# EAGLE board circuito1.1 (EAGLE 9.6.2)
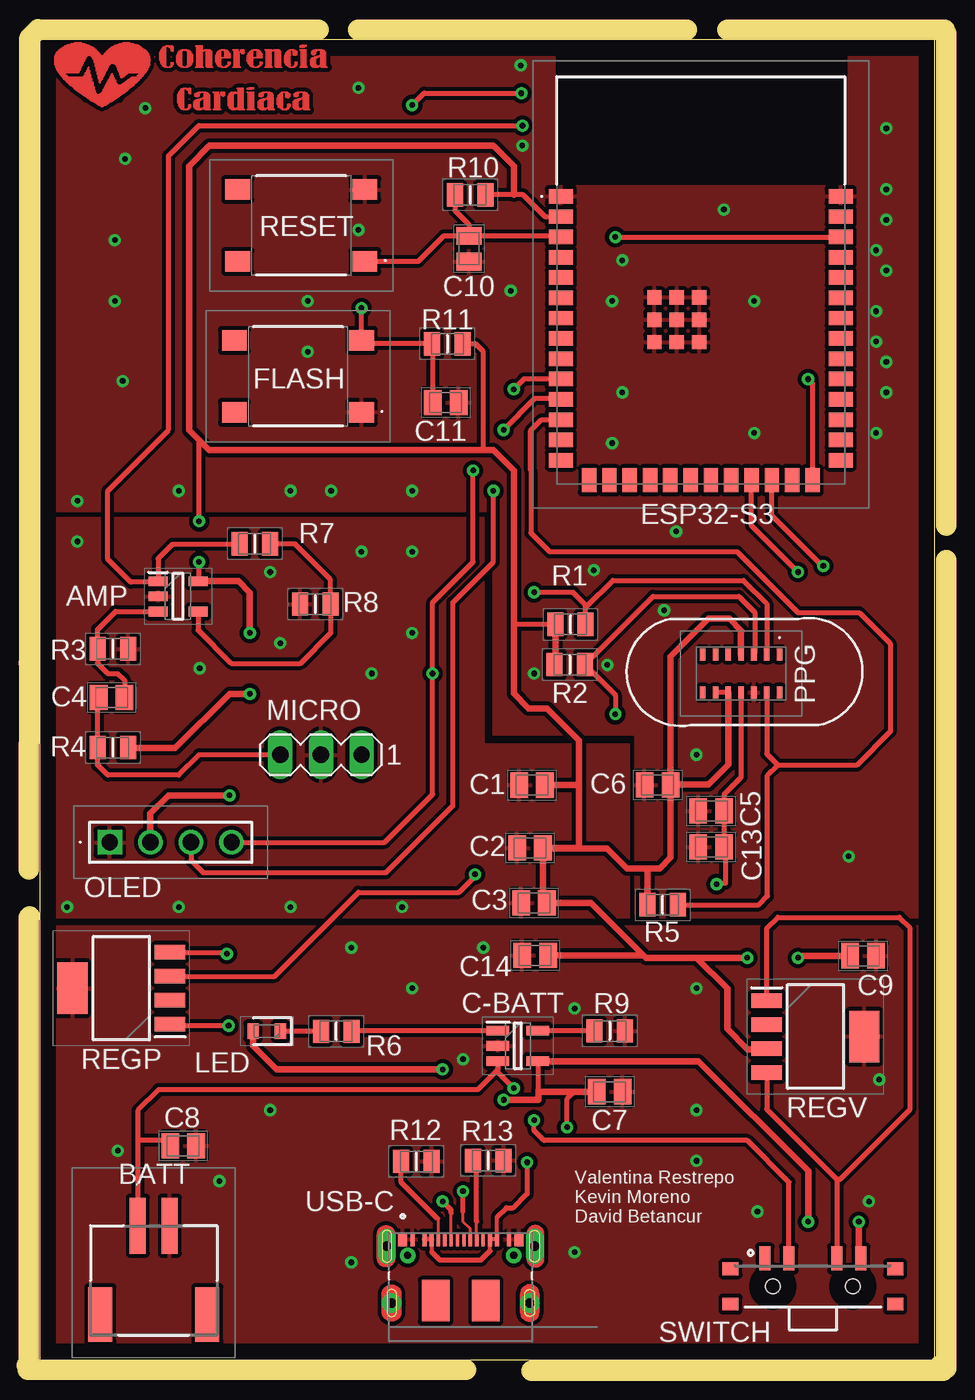
[diagram p0: board, top side]
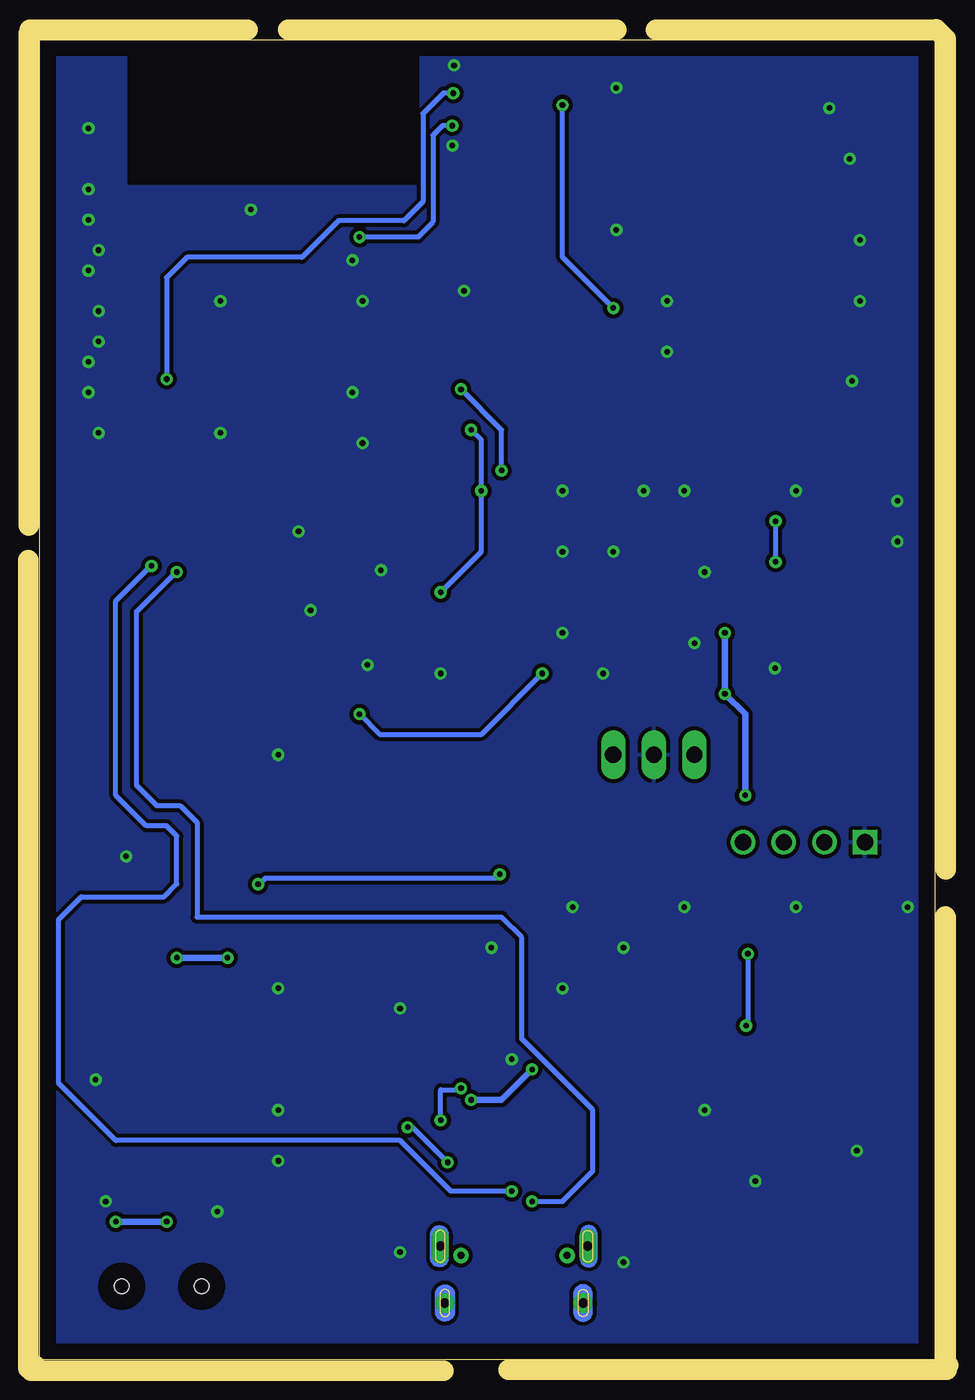
[diagram p1: board, bottom side, seen from below]

Size 55.98 x 82.54 mm. Coordinates in mm from the lower left corner, seen from the top.
Outline: 0,0 55.98,0 55.98,82.54 0,82.54 0,0
Copper layers (1*16): Top 0.035mm / dielectric 1.5mm / Bottom 0.035mm
Design rules "default": minimum track width 6mil, minimum drill 0.35mm, track to track 6mil, track to pad 6mil, pad to pad 6mil, via to via 6mil, smd to smd 6mil, copper to edge 40mil, drill to drill 6mil, minimum pad ring 10mil, minimum via ring 8mil, stop-mask expansion 4mil, vias tented up to drill 0mil, thermal gap 10mil
Milling: 21 lines

## Footprints (pad centres in the part's own frame; a part is rotated, then mirrored left to right if it is on the bottom)
SOT95P280X145-5N = smd 1.2 x 0.6: 1 -1.25,0.95; 2 -1.25,0; 3 -1.25,-0.95; 4 1.25,-0.95; 5 1.25,0.95
1769 = smd 1 x 3.5: 1 -1,0; 2 1,0 | smd 1.5 x 3.4: 3 -3.35,-5.55; 4 3.35,-5.55
CAPC2012X140N = smd 1.1 x 1.57: 1 -0.81,0; 2 0.81,0
SOT95P270X145-5N = smd 1.4 x 0.6: 1 -1.25,0.95; 2 -1.25,0; 3 -1.25,-0.95; 4 1.25,-0.95; 5 1.25,0.95
ESP32S3WROOM1N16R8 = smd 1.5 x 0.9: 1 -8.75,5.26; 2 -8.75,3.99; 3 -8.75,2.72; 4 -8.75,1.45; 5 -8.75,0.18; 6 -8.75,-1.09; 7 -8.75,-2.36; 8 -8.75,-3.63; 9 -8.75,-4.9; 10 -8.75,-6.17; 11 -8.75,-7.44; 12 -8.75,-8.71; 13 -8.75,-9.98; 14 -8.75,-11.25; 27 8.75,-11.25; 28 8.75,-9.98; 29 8.75,-8.71; 30 8.75,-7.44; 31 8.75,-6.17; 32 8.75,-4.9; 33 8.75,-3.63; 34 8.75,-2.36; 35 8.75,-1.09; 36 8.75,0.18; 37 8.75,1.45; 38 8.75,2.72; 39 8.75,3.99; 40 8.75,5.26 | smd 0.9 x 1.5: 15 -6.985,-12.5; 16 -5.715,-12.5; 17 -4.445,-12.5; 18 -3.175,-12.5; 19 -1.905,-12.5; 20 -0.635,-12.5; 21 0.635,-12.5; 22 1.905,-12.5; 23 3.175,-12.5; 24 4.445,-12.5; 25 5.715,-12.5; 26 6.985,-12.5 | smd 0.9 x 0.9: 41 -1.5,-2.46; 42 -2.9,-1.06; 43 -2.9,-2.46; 44 -2.9,-3.86; 45 -1.5,-3.86; 46 -0.1,-3.86; 47 -0.1,-2.46; 48 -0.1,-1.06; 49 -1.5,-1.06
DTSM61NVTR = smd 1.55 x 1.3: 1 -3.975,2.25; 2 3.975,2.25; 3 -3.975,-2.25; 4 3.975,-2.25
LEDC1608X65N = smd 0.7 x 0.95: 1 -0.85,0; 2 0.85,0
MA03-1 = drill 1.016 long: 1 -2.54,0; 2 0,0; 3 2.54,0
TSW10407GS = drill 1.02 pad 1.53 square: 1 0,0 | drill 1.02 pad 1.53: 2 2.54,0; 3 5.08,0; 4 7.62,0
MAX30102EFDT = smd 0.75 x 0.35: 1 -1.2,2.4; 2 -1.2,1.6; 3 -1.2,0.8; 4 -1.2,0; 5 -1.2,-0.8; 6 -1.2,-1.6; 7 -1.2,-2.4; 8 1.2,-2.4; 9 1.2,-1.6; 10 1.2,-0.8; 11 1.2,0; 12 1.2,0.8; 13 1.2,1.6; 14 1.2,2.4
RESC2013X65N = smd 1 x 1.45: 1 -0.95,0; 2 0.95,0
SOT150P700X180-5N = smd 1.9 x 0.9: 1 -3.05,2.25; 2 -3.05,0.75; 3 -3.05,-0.75; 4 -3.05,-2.25 | smd 1.9 x 3.2: 5 3.05,0
SW_PCM13SMTR = smd 0.7 x 1.5: 1 -3,1.75; 2 -1.5,1.75; 3 1.5,1.75; 4 3,1.75 | smd 1 x 0.8: P$1 -5.15,1.1; P$2 -5.15,-1.1; P$3 5.15,1.1; P$4 5.15,-1.1 | hole 0.9: -2.5,0; 2.5,0
HIROSE_CX90B-16P1 = smd 0.57 x 0.85: A1 -3.635,3.65; A12 3.635,3.65 | smd 0.25 x 0.85: A4 -2.275,3.65; A9 2.275,3.65; B1 3.025,3.65; B4 1.825,3.65; B9 -1.825,3.65; B12 -3.025,3.65 | smd 0.2 x 0.85: A5 -1.4,3.65; A6 -0.6,3.65; A7 0.6,3.65; A8 1.4,3.65; B5 1,3.65; B6 0.2,3.65; B7 -0.2,3.65; B8 -1,3.65 | drill 0.45 pad 0.75: MID1 -3.32,2.65; MID2 3.32,2.65 | drill 0.6 pad 1 long: SH1 -4.62,3.225; SH2 4.62,3.225 | drill 0.6 pad 1.2: SH3 -4.32,-0.325; SH4 4.32,-0.325 | smd 1.71 x 2.6: SH5 -1.565,-0.175; SH6 1.565,-0.175

## Placement (x,y rotation side)
AMP  TS321IDBVR  [SOT95P280X145-5N]  8.64,47.74 0 top
BATT  1769  [1769]  7.12,8.37 0 top
C1  100nF  [CAPC2012X140N]  30.78,35.93 0 top
C2  100nF  [CAPC2012X140N]  30.66,31.99 0 top
C3  10µF  [CAPC2012X140N]  30.91,28.56 0 top
C4  0.1µF  [CAPC2012X140N]  4.48,41.41 0 top
C5  100nF  [CAPC2012X140N]  41.99,34.32 0 top
C6  10µF  [CAPC2012X140N]  38.64,35.93 0 top
C7  10U  [CAPC2012X140N]  35.64,16.76 180 top
C8  10U  [CAPC2012X140N]  8.96,13.36 0 top
C9  0,1U  [CAPC2012X140N]  51.5,25.26 0 top
C10  0,1U  [CAPC2012X140N]  26.83,69.48 270 top
C11  0,1U  [CAPC2012X140N]  25.38,59.86 180 top
C13  100nF  [CAPC2012X140N]  41.99,32.06 0 top
C14  10µF  [CAPC2012X140N]  30.98,25.28 0 top
C-BATT  MCP73831T-2ACI_OT  [SOT95P270X145-5N]  29.9,19.62 0 top
ESP32-S3  ESP32-S3-WROOM-1-N16R8  [ESP32S3WROOM1N16R8]  41.34,67.5 0 top
FLASH  DTSM-61N-V-T_R  [DTSM61NVTR]  16.14,61.5 180 top
LED  SML-D12U8WT86C  [LEDC1608X65N]  14.19,20.54 180 top
MICRO  [MA03-1]  17.57,37.83 180 top
OLED  TSW-104-07-G-S  [TSW10407GS]  4.37,32.36 0 top
PPG  MAX30102EFD+T  [MAX30102EFDT]  43.86,42.91 270 top
R1  4,7k  [RESC2013X65N]  33.19,45.99 180 top
R2  4,7k  [RESC2013X65N]  33.15,43.47 0 top
R3  10K  [RESC2013X65N]  4.56,44.45 0 top
R4  4,7k  [RESC2013X65N]  4.56,38.28 0 top
R5  10K  [RESC2013X65N]  38.95,28.45 180 top
R6  5,1K  [RESC2013X65N]  18.54,20.53 180 top
R7  200K  [RESC2013X65N]  13.44,51.03 0 top
R8  10K  [RESC2013X65N]  17.22,47.25 0 top
R9  2K  [RESC2013X65N]  35.65,20.55 0 top
R10  10K  [RESC2013X65N]  26.91,72.85 0 top
R11  10K  [RESC2013X65N]  25.48,63.53 0 top
R12  5,1K  [RESC2013X65N]  23.55,12.39 180 top
R13  5,1K  [RESC2013X65N]  28.05,12.45 180 top
REGP  LP38692MP-1.8_NOPB  [SOT150P700X180-5N]  5.08,23.23 180 top
REGV  LP38692MP-3.3_NOPB  [SOT150P700X180-5N]  48.52,20.2 0 top
RESET  DTSM-61N-V-T_R  [DTSM61NVTR]  16.35,70.94 180 top
SWITCH  PCM13SMTR  [SW_PCM13SMTR]  48.35,4.57 0 top
USB-C  CX90B-16P1  [HIROSE_CX90B-16P1]  26.32,3.86 0 top

## Library data of the parts
AMP = TS321IDBVR; DESCRIPTION: Texas Instruments TS321IDBVR Op Amp, 0.8MHz, 5 32 V, 5-Pin SOT-23; HEIGHT: 1.45mm; MANUFACTURER_NAME: Texas Instruments; MANUFACTURER_PART_NUMBER: TS321IDBVR; MOUSER_PART_NUMBER: 595-TS321IDBVR; MOUSER_PRICE-STOCK: https://www.mouser.co.uk/ProductDetail/Texas-Instruments/TS321IDBVR?qs=BBezV1N05%2FuyNsgiemJ6Dw%3D%3D
BATT = 1769; DESCRIPTION: Adafruit Accessories JST-PH 2-pin SMT Right Angle Connect; HEIGHT: 5.5mm; MANUFACTURER_NAME: Adafruit; MANUFACTURER_PART_NUMBER: 1769; MOUSER_PART_NUMBER: 485-1769; MOUSER_PRICE-STOCK: https://www.mouser.co.uk/ProductDetail/Adafruit/1769?qs=GURawfaeGuBbgoGtf2XstA%3D%3D
C1-C11 C13 C14 = C0805J104K1RACAUTO; DESCRIPTION: SMD Auto X7R FO, Ceramic, 0.1 uF, 10%, 100 VDC, X7R, SMD, MLCC, Open Mode, Automotive Grade, 0805, 0.6 mm; HEIGHT: 1.4mm; MANUFACTURER_NAME: KEMET; MANUFACTURER_PART_NUMBER: C0805J104K1RACAUTO
C-BATT = MCP73831T-2ACI_OT; DESCRIPTION: Li-Ion Charge Controller 4.2V SOT23-5; HEIGHT: 1.45mm; MANUFACTURER_NAME: Microchip; MANUFACTURER_PART_NUMBER: MCP73831T-2ACI/OT; MOUSER_PART_NUMBER: 579-MCP73831T-2ACIOT; MOUSER_PRICE-STOCK: https://www.mouser.co.uk/ProductDetail/Microchip-Technology/MCP73831T-2ACI-OT?qs=yUQqVecv4qvbBQBGbHx0Mw%3D%3D
ESP32-S3 = ESP32-S3-WROOM-1-N16R8; DESCRIPTION: Multiprotocol Modules SMD Module, ESP32-S3R8, 3.3V, 8 MB Octal PSRAM Die, 16 MB Quad SPI Flash, PCB Antenna; HEIGHT: 3.25mm; MANUFACTURER_NAME: Espressif Systems; MANUFACTURER_PART_NUMBER: ESP32-S3-WROOM-1-N16R8; MOUSER_PART_NUMBER: 356-ESP32S3WRM1N16R8; MOUSER_PRICE-STOCK: https://www.mouser.co.uk/ProductDetail/Espressif-Systems/ESP32-S3-WROOM-1-N16R8?qs=Li%252BoUPsLEnvQc9gW6AMhZg%3D%3D
FLASH RESET = DTSM-61N-V-T_R; DESCRIPTION: Tactile Switches Surface Mounting Type 6*6; HEIGHT: 4.4mm; MANUFACTURER_NAME: Diptronics; MANUFACTURER_PART_NUMBER: DTSM-61N-V-T/R; MOUSER_PART_NUMBER: 113-DTSM-61N-V-T/R; MOUSER_PRICE-STOCK: https://www.mouser.co.uk/ProductDetail/Diptronics/DTSM-61N-V-T-R?qs=gTYE2QTfZfSEmzuLs2FKeQ%3D%3D
LED = SML-D12U8WT86C; DESCRIPTION: ROHM SML-D12U8WT86C, EXCELED 625 nm Red LED, 0603 Milky White SMD package; HEIGHT: 0.65mm; MANUFACTURER_NAME: ROHM Semiconductor; MANUFACTURER_PART_NUMBER: SML-D12U8WT86C; MOUSER_PART_NUMBER: 755-SML-D12U8WT86C; MOUSER_PRICE-STOCK: https://www.mouser.co.uk/ProductDetail/ROHM-Semiconductor/SML-D12U8WT86C?qs=HXFqYaX1Q2wNcb%2FPJz96zg%3D%3D
MICRO = con-lstb; OC_FARNELL: unknown; OC_NEWARK: unknown
OLED = TSW-104-07-G-S; DESCRIPTION: Samtec, TSW, 4 Way, 1 Row, Straight Pin Header; HEIGHT: mm; MANUFACTURER_NAME: SAMTEC; MANUFACTURER_PART_NUMBER: TSW-104-07-G-S; MOUSER_PART_NUMBER: 200-TSW10407GS; MOUSER_PRICE-STOCK: https://www.mouser.co.uk/ProductDetail/Samtec/TSW-104-07-G-S?qs=hzq9O0YpnZuXshDH2O29kQ%3D%3D
PPG = MAX30102EFD+T; DESCRIPTION: Biometric Sensors Integrated Optical Sensor; HEIGHT: 1.65mm; MANUFACTURER_NAME: Analog Devices; MANUFACTURER_PART_NUMBER: MAX30102EFD+T; MOUSER_PART_NUMBER: 700-MAX30102EFD+T; MOUSER_PRICE-STOCK: https://www.mouser.co.uk/ProductDetail/Analog-Devices-Maxim-Integrated/MAX30102EFD%2bT?qs=nVS1qgv%252BQrkHA4%2FoFYriFA%3D%3D
R1-R13 = 0805S8F1202P5E; DESCRIPTION: Jumper Wires & Zero-ohm Resistors; HEIGHT: 0.65mm; MANUFACTURER_NAME: ROYALOHM; MANUFACTURER_PART_NUMBER: 0805S8F1202P5E
REGP = LP38692MP-1.8_NOPB; DESCRIPTION: LP38692MP-1.8/NOPB, Low Dropout Voltage Regulator, 1A, 1.8 V +/-2.5%, 2.7 10 Vin, 5-Pin SOT-223; HEIGHT: 1.8mm; MANUFACTURER_NAME: Texas Instruments; MANUFACTURER_PART_NUMBER: LP38692MP-1.8/NOPB; MOUSER_PART_NUMBER: 926-LP38692MP18NOPB; MOUSER_PRICE-STOCK: https://www.mouser.co.uk/ProductDetail/Texas-Instruments/LP38692MP-1.8-NOPB?qs=1FNqv8aZn1ScMhd5Fp7uyA%3D%3D
REGV = LP38692MP-3.3_NOPB; DESCRIPTION: LP38692MP-3.3/NOPB, Low Dropout Voltage Regulator, 1A, 3.3 V +/-2.5%, 2.7 10 Vin, 5-Pin SOT-223; HEIGHT: 1.8mm; MANUFACTURER_NAME: Texas Instruments; MANUFACTURER_PART_NUMBER: LP38692MP-3.3/NOPB; MOUSER_PART_NUMBER: 926-LP38692MP3.3NOPB; MOUSER_PRICE-STOCK: https://www.mouser.co.uk/ProductDetail/Texas-Instruments/LP38692MP-3.3-NOPB?qs=1FNqv8aZn1TpKuOP2NKBdg%3D%3D
SWITCH = PCM13SMTR; AVAILABILITY: In Stock; CHECK_PRICES: https://www.snapeda.com/parts/PCM13SMTR/C%2526K/view-part/?ref=eda; DESCRIPTION: Slide Switch SP3T Surface Mount, Right Angle; MF: C&K; MP: PCM13SMTR; PACKAGE: None; PRICE: None; SNAPEDA_LINK: https://www.snapeda.com/parts/PCM13SMTR/C%2526K/view-part/?ref=snap
USB-C = CX90B-16P1; AVAILABILITY: In Stock; CHECK_PRICES: https://www.snapeda.com/parts/CX90B-16P1/Hirose+Electric+Co+Ltd/view-part/?ref=eda; DESCRIPTION: Serie CX, receptáculo de conector rectangular; MF: Hirose Electric Co Ltd; MP: CX90B-16P1; PACKAGE: None; PRICE: None; SNAPEDA_LINK: https://www.snapeda.com/parts/CX90B-16P1/Hirose+Electric+Co+Ltd/view-part/?ref=snap

## Nets
+3V3: AMP.5 C1.2 C2.2 C3.2 C6.2 C9.1 C14.2 ESP32-S3.2 OLED.2 PPG.4 PPG.9 PPG.10 R1.2 R2.1 R4.2 R5.2 R10.2 R11.2 REGV.3
BATT+: BATT.1 C8.1 C-BATT.3 SWITCH.2
COMM: REGP.1 REGP.4
D1+: ESP32-S3.23 USB-C.A6
D1-: ESP32-S3.24 USB-C.A7
EN: C10.1 ESP32-S3.3 R10.1 RESET.1
GND: AMP.2 BATT.2 C1.1 C2.1 C3.1 C5.1 C6.1 C7.1 C8.2 C9.2 C10.2 C11.1 C13.1 C14.1 C-BATT.2 ESP32-S3.1 ESP32-S3.40 ESP32-S3.41 ESP32-S3.42 ESP32-S3.43 ESP32-S3.44 ESP32-S3.45 ESP32-S3.46 ESP32-S3.47 ESP32-S3.48 ESP32-S3.49 FLASH.1 MICRO.2 OLED.1 PPG.12 R3.2 R8.1 R9.2 R12.1 R13.1 REGP.5 REGV.5 RESET.3 USB-C.A1 USB-C.A12 USB-C.B1 USB-C.B12
INT: ESP32-S3.12 PPG.13 R5.1
N$1: AMP.3 C4.2 R3.1
N$3: C-BATT.1 R6.1
N$4: AMP.4 R7.2 R8.2
N$5: LED.1 R6.2
N$6: REGV.1 REGV.4 SWITCH.3
N$8: R12.2 USB-C.A5
N$9: R13.2 USB-C.B5
N$11: C4.1 MICRO.3 R4.1
N$13: C-BATT.5 R9.1
N$5023: C11.2 ESP32-S3.26 FLASH.3 R11.1
OUT: AMP.1 ESP32-S3.38 R7.1
RST-RA: ESP32-S3.27
RXD: ESP32-S3.36
SCL: ESP32-S3.11 OLED.3 PPG.2 R1.1
SDA: ESP32-S3.10 OLED.4 PPG.3 R2.2
TOUCH1: ESP32-S3.4
TOUCH2: ESP32-S3.5
TOUCH3: ESP32-S3.6
TXD: ESP32-S3.37
VDD: C7.2 C-BATT.4 LED.2 SWITCH.4 USB-C.A4 USB-C.A9 USB-C.B4 USB-C.B9
VDD2: C5.2 C13.2 PPG.11 REGP.3

## Tracks (layer width: path | path; a pad name or v marks a point on that pad's centre or on a via)
+3V3  (via drill 0.35)
  Top 0.152: R2.1 32.15,43.52 | 33.26,71.49 ESP32-S3.2 | C2.2 33.45,31.99 | 39.96,35.98 39.71,35.73 39.65,35.73 C6.2
  Top 0.305: ESP32-S3.2 31.58,71.49 30.22,72.85 29.64,72.85 R10.2 | R11.2 27.24,63.53 27.73,63.04 27.73,56.88 | AMP.5 9.95,48.76 v9.95,49.9 | v9.95,52.44 9.95,57.52 9.32,58.15 | R1.2 29.65,45.99 | PPG.10 PPG.9
  Top 0.406: R5.2 38,30.66 38.07,30.73 | 38.07,30.73 38.78,30.73 39.45,31.4 C6.2 39.45,43.97 41.82,46.34 43.12,46.34 43.89,45.58 43.89,45.55 43.86,45.52 PPG.4 | 38.07,30.73 36.71,30.73 35.47,31.97 31.49,31.97 C2.2 | 33.71,35.93 33.71,38.73 31.71,40.73 30.57,40.73 29.65,41.65 29.65,45.99 29.64,46 29.64,55.61 28.37,56.88 27.73,56.88 10.59,56.88 9.32,58.15 9.32,74.66 10.59,75.93 28.37,75.93 29.64,74.66 29.64,72.85 | C1.2 33.71,35.93 | C2.2 33.71,31.99 33.71,35.93 | R1.2 32.24,43.61 32.15,43.52 | R4.2 5.54,38.25 8.47,38.25 11.86,41.64 v13.13,41.64 | v13.13,45.45 13.13,47.99 12.43,48.69 AMP.5 | OLED.2 6.91,34.15 8.05,35.29 v11.86,35.29 | 31.97,28.3 C3.2 | C3.2 34.47,28.56 37.74,25.28 | C3.2 31.47,28.81 C2.2 | REGV.3 45.43,19.41 44.24,19.41 42.99,20.67 42.99,23.21 41.07,25.13 | 41.07,25.13 37.9,25.13 37.74,25.28 | 41.07,25.13 v44.24,25.13 | v47.42,25.13 47.55,25.26 C9.1 | PPG.10 43.06,37.23 41.82,35.98 39.96,35.98 | C14.2 37.74,25.28
  Bottom 0.305: v9.95,49.9 v9.95,52.44
  Bottom 0.406: v13.13,45.45 v13.13,41.64 11.86,40.37 v11.86,35.29 | v44.24,25.13 v47.42,25.13
BATT+  (via drill 0.35)
  Top 0.305: 6.12,13.7 6.12,15.58 7.41,16.88 27.39,16.88 28.65,18.14 C-BATT.3 28.65,17.96 v29.64,16.97 | 6.12,13.7 BATT.1 | C8.1 7.81,13.7 6.12,13.7 | SWITCH.2 46.85,11.09 44.24,13.7 31.54,13.7 30.91,14.33 v30.91,14.97
  Bottom 0.305: v30.91,14.97 30.91,16.88 29.64,16.88 v29.64,16.97
COMM  (via drill 0.35)
  Top 0.305: REGP.4 11.66,25.48 11.69,25.45 v11.69,25.38 | v11.8,20.88 8.23,20.88 REGP.1
  Bottom 0.305: v11.69,25.38 11.69,20.95 11.76,20.88 v11.8,20.88
D1+  (via drill 0.35)
  Top 0.203: USB-C.A6 25.72,9.15
  Top 0.305: 25.72,9.15 25.72,9.36 v25.2,9.89 | v47.42,49.26 44.51,52.17 ESP32-S3.23
  Bottom 0.305: v25.2,9.89 23.29,9.89 21.38,11.79 21.38,15.61 25.83,20.05 25.83,26.4 27.1,27.67 46.15,27.67 46.15,33.59 47.21,34.66 48.69,34.66 49.96,35.93 49.96,46.75 47.45,49.26 v47.42,49.26
D1-  (via drill 0.35)
  Top 0.203: USB-C.A7 26.92,8.16 26.46,8.62 26.46,9.26
  Top 0.305: 26.46,9.26 v26.46,10.53 | v49.01,49.64 48.95,49.64 45.79,52.8 ESP32-S3.24
  Bottom 0.305: v26.46,10.53 30.27,10.53 33.45,13.7 51.23,13.7 54.81,17.28 54.81,27.52 53.39,28.94 48.22,28.94 47.42,29.74 47.42,32.75 48.05,33.38 49.32,33.38 51.23,35.29 51.23,47.46 49.05,49.64 v49.01,49.64
EN
  Top 0.305: ESP32-S3.3 32.51,70.3 C10.1 | RESET.1 23.67,68.69 25.27,70.3 C10.1 | R10.1 25.96,71.87 26.83,71 C10.1
GND  (via drill 0.35)
  Top 0.152: AMP.2 7.64,47.99 | C8.2 9.77,13.4 10.17,13.8
  other vias: 20.75,42.91 23.29,50.53 23.29,54.34 18.21,54.34 15.67,54.34 14.4,49.26 44.69,57.96 8.68,54.34 2.33,53.71 20.12,50.53 2.33,51.17 8.68,28.3 15.67,28.3 19.48,25.77 22.65,28.3 1.7,28.3 27.73,25.77 41.07,23.22 52.5,17.51 23.29,45.45 30.91,42.91 34.65,49.38 4.88,13.06 11.22,11.16 33.45,21.95 26.46,18.78 44.88,9.26 51.87,9.89 33.45,6.71 19.48,6.08 41.07,12.43 41.07,15.61 15.03,44.82 9.99,43.24 35.49,43.46 39.05,46.87 39.8,51.8 41.07,37.83 50.59,31.48 44.69,66.21 36.43,60.5 35.8,66.21 42.78,71.93 35.8,57.32 36.43,68.75 52.31,57.96 52.94,60.5 52.94,62.4 52.31,63.67 52.31,65.58 52.94,68.12 52.31,69.39 52.94,71.29 52.94,73.2 52.94,77.01 30.08,80.95 30.18,75.94 29.45,66.85 19.92,79.55 19.92,70.66 16.75,66.21 16.75,63.04 5.18,61.21 4.68,66.21 4.68,70.02 5.32,75.1 6.59,78.28 14.4,15.61 23.29,23.22
  pour Top (isolate 0.254): 0.43,27.08 56.31,27.08 56.31,1 0.43,1
  pour Top (isolate 0.254): 0.43,52.63 27.74,52.63 27.74,38.47 36.84,38.47 36.84,27.67 0.43,27.67
  pour Top (isolate 0.254): 0.43,53.07 28.37,53.07 28.37,39.1 37.26,39.1 37.26,27.67 55.04,27.67 55.04,70.85 30.91,70.85 30.91,82.28 0.43,82.28
  pour Bottom (isolate 0.254): 0.43,82.28 30.91,82.28 30.91,51.8 56.31,51.8 56.31,1 0.43,1
  pour Top (isolate 0.254): 51.23,70.85 55.67,70.85 55.67,82.28 50.59,82.28 50.59,73.39 51.23,73.39
  pour Top (isolate 0.254): 32.18,82.28 32.18,73.39 31.54,73.39 31.54,70.21 30.91,70.21 30.91,82.28
  pour Bottom (isolate 0.254): 56.31,51.8 56.31,82.91 50.59,82.91 50.59,73.39 51.23,73.39 51.23,51.8
  pour Bottom (isolate 0.254): 30.91,82.28 32.18,82.28 32.18,73.39 31.54,73.39 31.54,70.21 31.54,54.98 30.91,54.98
  pour Bottom (isolate 0.254): 32.18,73.39 51.23,73.39 51.23,51.8 30.91,51.8 30.91,73.39
  pour Top (isolate 0.254): 30.91,73.39 51.23,73.39 51.23,53.71 30.91,53.71
INT
  Top 0.152: 30.71,55.61 30.71,55.71 30.69,55.69 30.69,55.63 | R5.1 39.62,28.17
  Top 0.305: 30.69,55.63 30.69,58.1 31.38,58.79 ESP32-S3.12 | 30.71,55.61 30.71,51.7 31.88,50.53 43.61,50.53 47.42,46.72 51.25,46.72 53.19,44.77 53.19,39.27 51.1,37.17 46.13,37.17 | PPG.13 45.46,37.89 46.15,37.2 46.13,37.17 | 46.13,37.17 45.51,36.56 45.51,28.99 44.98,28.45 R5.1
N$1
  Top 0.305: AMP.3 4.73,46.79 3.61,45.66 R3.1 3.61,43.54 4.24,42.91 4.88,42.91 5.29,42.49 C4.2
N$3
  Top 0.152: 19.57,20.62 R6.1
  Top 0.305: C-BATT.1 19.52,20.57 19.57,20.62
N$4
  Top 0.152: 14.36,51.05 R7.2 14.54,51.03
  Top 0.305: AMP.4 9.89,45.62 11.96,43.55 16.3,43.55 18.19,45.43 18.19,47.23 R8.2 18.17,48.78 15.92,51.03 R7.2
N$5
  Top 0.305: R6.2 LED.1
N$6
  Top 0.305: REGV.1 45.47,26.99 46.15,27.67 53.77,27.67 54.4,27.04 54.4,15.61 50.06,11.26 49.85,11.26 | REGV.4 45.47,15.65 49.85,11.26 | 49.85,11.26 SWITCH.3
N$8
  Top 0.203: USB-C.A5 24.92,8.77 24.88,8.81
  Top 0.305: 24.88,8.81 22.6,11.08 R12.2
N$9
  Top 0.203: USB-C.B5 27.32,8.62 27.32,8.72
  Top 0.305: 27.32,8.62 27.32,12.22 R13.2
N$11
  Top 0.305: C4.1 3.61,41.35 R4.1 3.61,37.19 4.24,36.56 8.68,36.56 9.95,37.83 MICRO.3
N$13
  Top 0.305: R9.1 31.17,20.55 C-BATT.5
N$5023  (via drill 0.35)
  Top 0.305: v23.29,78.47 24.03,79.21 v30.12,79.21 | v48.05,61.33 48.32,61.05 ESP32-S3.26 | R11.1 24.57,63.5 C11.2 | R11.1 24.38,63.69 | R11.1 20.33,63.53 FLASH.3 v20.12,65.77
  Bottom 0.305: v20.12,65.77 23.29,68.94 v23.29,78.47 | v30.12,79.21 30.74,79.21 32.02,77.93 32.02,72.41 33.21,71.22 37.3,71.22 37.45,71.08 39.59,68.94 46.79,68.94 48.05,67.67 v48.05,61.33
OUT  (via drill 0.35)
  Top 0.152: R7.1 12.45,50.99
  Top 0.305: v30.18,77.18 9.93,77.18 8.05,75.3 8.05,58.15 4.24,54.34 4.24,50.07 5.68,48.62 7.32,48.62 AMP.1 7.39,50.1 8.28,50.99 12.45,50.99 | v35.99,70.21 ESP32-S3.38
  Bottom 0.305: v30.18,77.18 30.79,77.18 31.39,76.57 31.39,71.14 32.32,70.21 v35.99,70.21
SCL  (via drill 0.35)
  Top 0.305: PPG.2 45.46,47.28 44.01,48.73 35.84,48.73 34.14,47.04 R1.1 34.14,47.21 33.36,47.99 v30.91,47.99 | OLED.3 9.45,31.22 10.21,30.47 21.64,30.47 25.83,34.66 25.83,47.36 28.37,49.9 v28.37,54.34 | v29.01,58.15 30.95,60.09 32.55,60.09 ESP32-S3.11
  Bottom 0.305: v29.01,58.15 28.37,57.52 v28.37,54.34 28.37,50.53 v30.91,47.99
SDA  (via drill 0.35)
  Top 0.152: 44.71,44.16 PPG.3
  Top 0.305: 44.71,44.16 44.71,46.73 43.71,47.73 38.36,47.73 R2.2 35.99,41.58 v35.99,40.37 | OLED.4 21.57,32.36 24.56,35.35 v24.56,42.91 24.56,47.36 27.1,49.9 v27.1,55.61 | v29.64,60.69 30.28,61.33 ESP32-S3.10
  Bottom 0.305: v35.99,40.37 34.72,39.1 28.37,39.1 v24.56,42.91 | v27.1,55.61 27.1,58.15 v29.64,60.69
VDD  (via drill 0.35)
  Top 0.254: 28.6,8.92 USB-C.A9 USB-C.B4 28.15,7.49 28.15,6.79 | USB-C.B9 24.5,6.74 24.51,6.73
  Top 0.305: SWITCH.4 51.23,6.45 | USB-C.B9 USB-C.A4 | 28.6,8.92 29.18,9.5 29.63,9.5 30.48,10.35 v30.48,12.33 | v32.97,14.53 32.97,16.3 33.43,16.76 | C-BATT.4 31.15,16.85 31.18,16.82 31.25,16.76 | 24.51,6.73 25,6.24 27.6,6.24 28.15,6.79
  Top 0.406: 51.23,6.45 v51.23,8.62 | v48.05,8.62 48.05,11.79 41.2,18.65 31.17,18.65 C-BATT.4 | LED.2 13.34,19.62 14.81,18.14 v25.2,18.14 | 31.18,16.82 31.18,16.24 v29.01,16.24 | C7.2 33.43,16.76 31.25,16.76
  Bottom 0.305: v30.48,12.33 32.67,14.53 v32.97,14.53
  Bottom 0.406: v51.23,8.62 v48.05,8.62 | v25.2,18.14 27.1,16.24 v29.01,16.24
VDD2  (via drill 0.35)
  Top 0.305: PPG.11 43.86,36.42 42.8,35.36 C5.2 C13.2 42.91,31.95 42.91,29.8 42.4,29.8 v42.33,29.73 | REGP.3 14.68,23.98 19.92,29.22 26.21,29.22 27.15,30.16 27.15,30.35 v27.22,30.35
  Bottom 0.305: v27.22,30.35 27.45,30.12 41.87,30.12 42.29,29.69 v42.33,29.73
(copper drawn outside any net)
  shapes: Top area x2109

## Text on the board
Top: C:/Users/user/OneDrive/Escritorio/LOGOTIPO1.3.bmp
tNames: Valentina Restrepo / Kevin Moreno / David Betancur
201bmp: C:/Users/user/OneDrive/Escritorio/LOGOTIPO1.3.bmp